# Altium PCB PCBgateway.PcbDoc
Units mm, origin at the board's own origin, x right, y up, seen from the top; angles counter-clockwise.
Board outline 58.8 x 67.31 mm, 2 copper layers (Top Layer, Bottom Layer); 35 components, 55 nets, 202 pads, 51 vias.
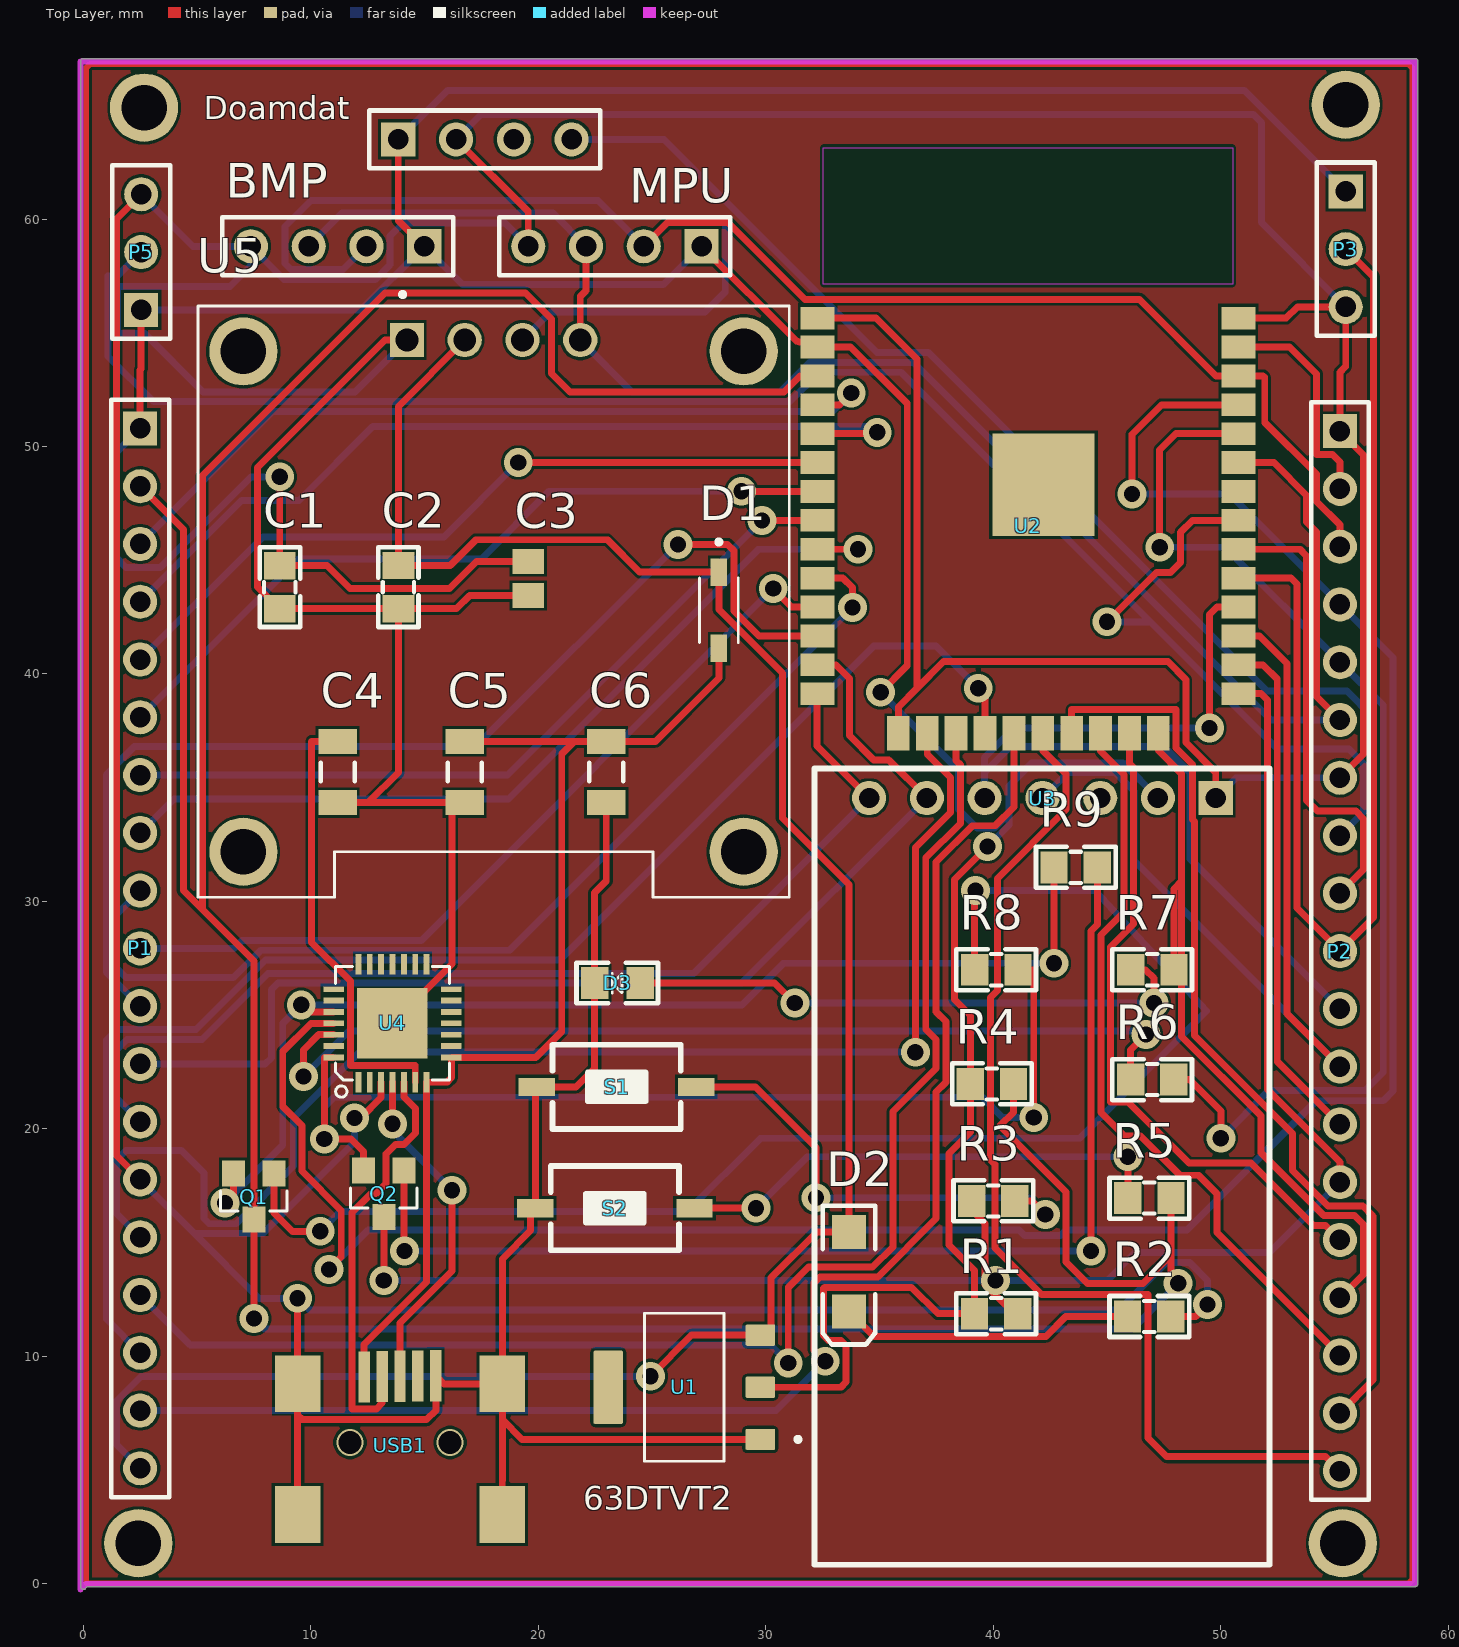
[diagram p0: Top Layer view]
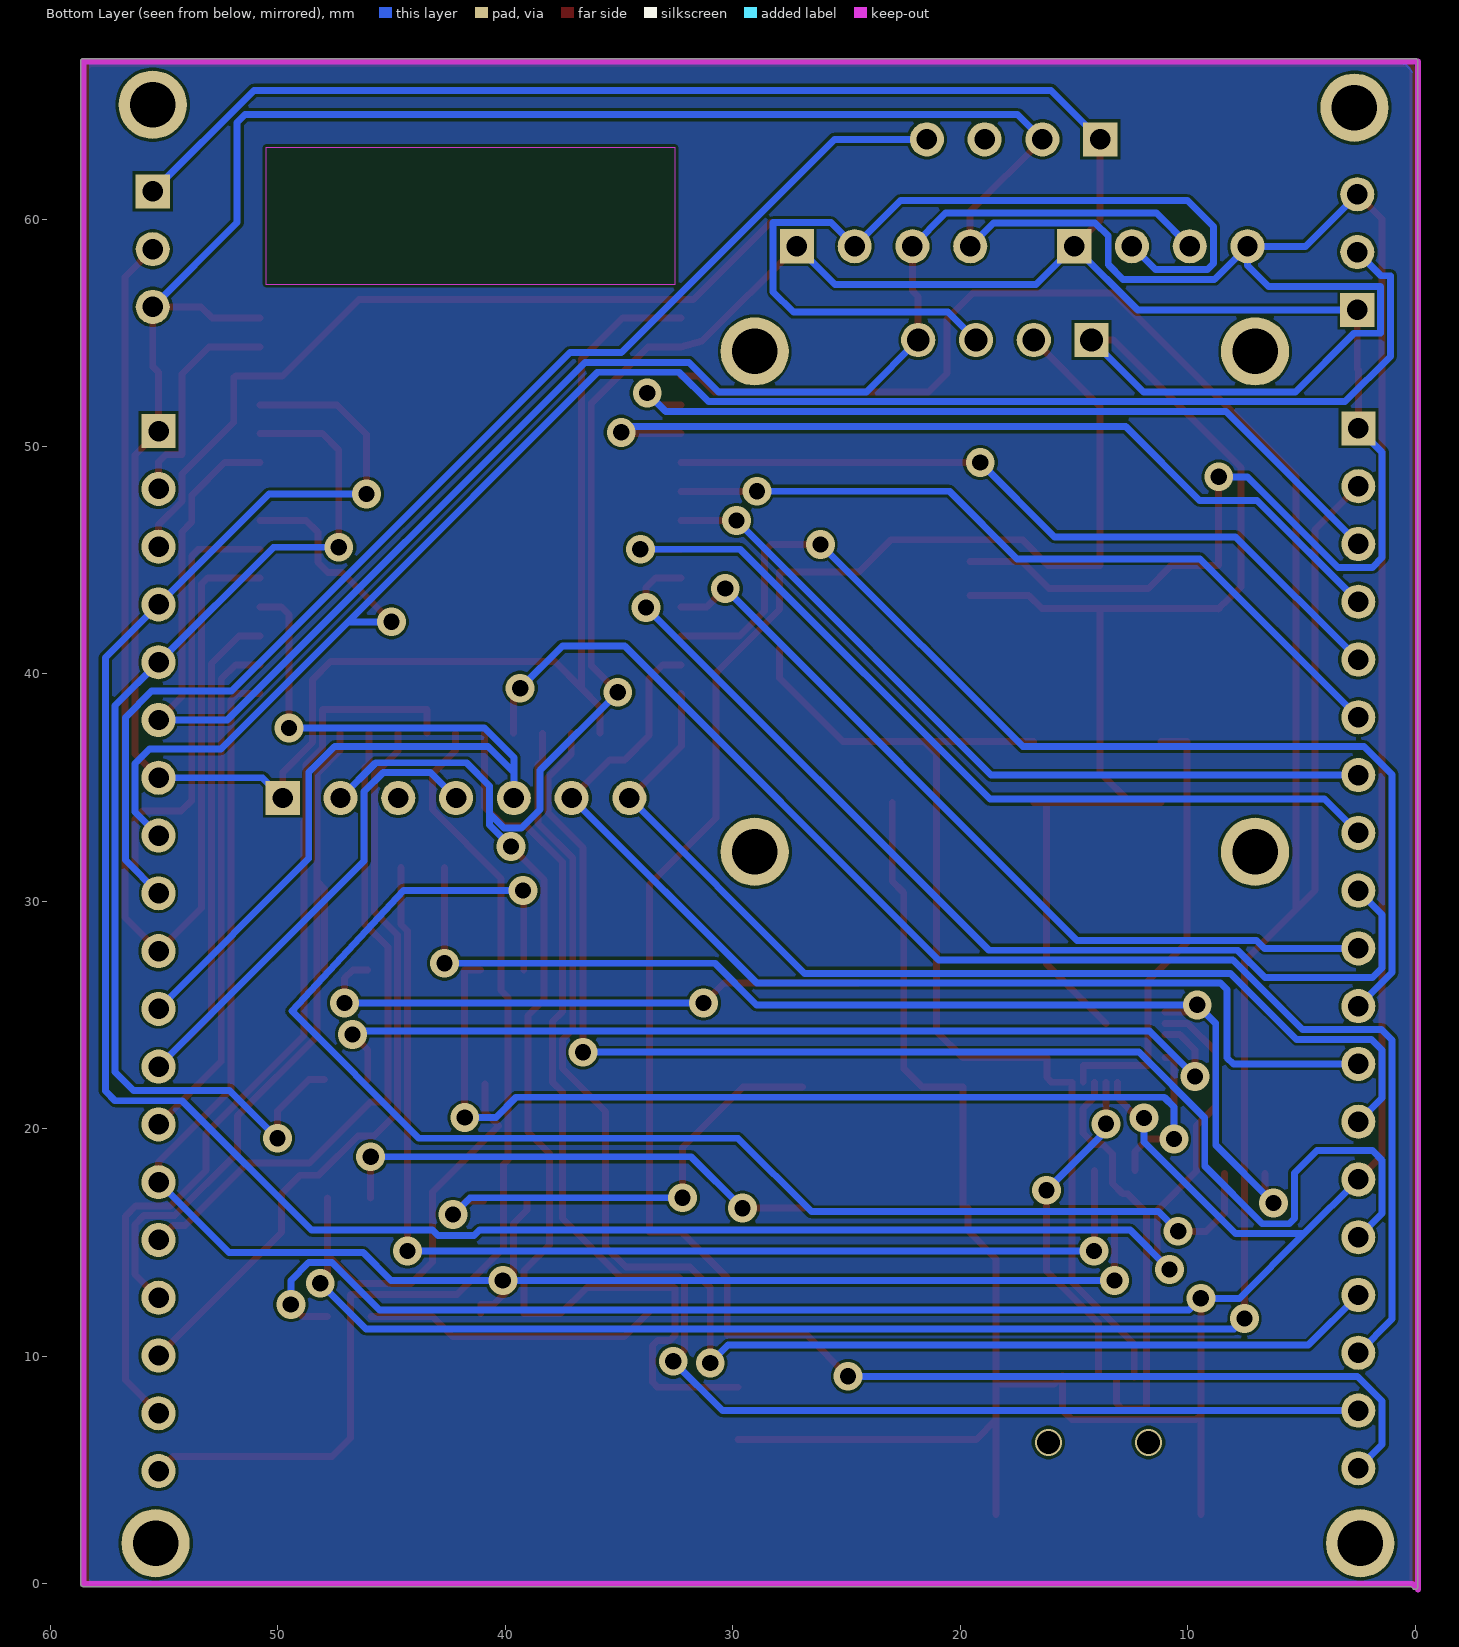
[diagram p1: Bottom Layer view, seen from below]
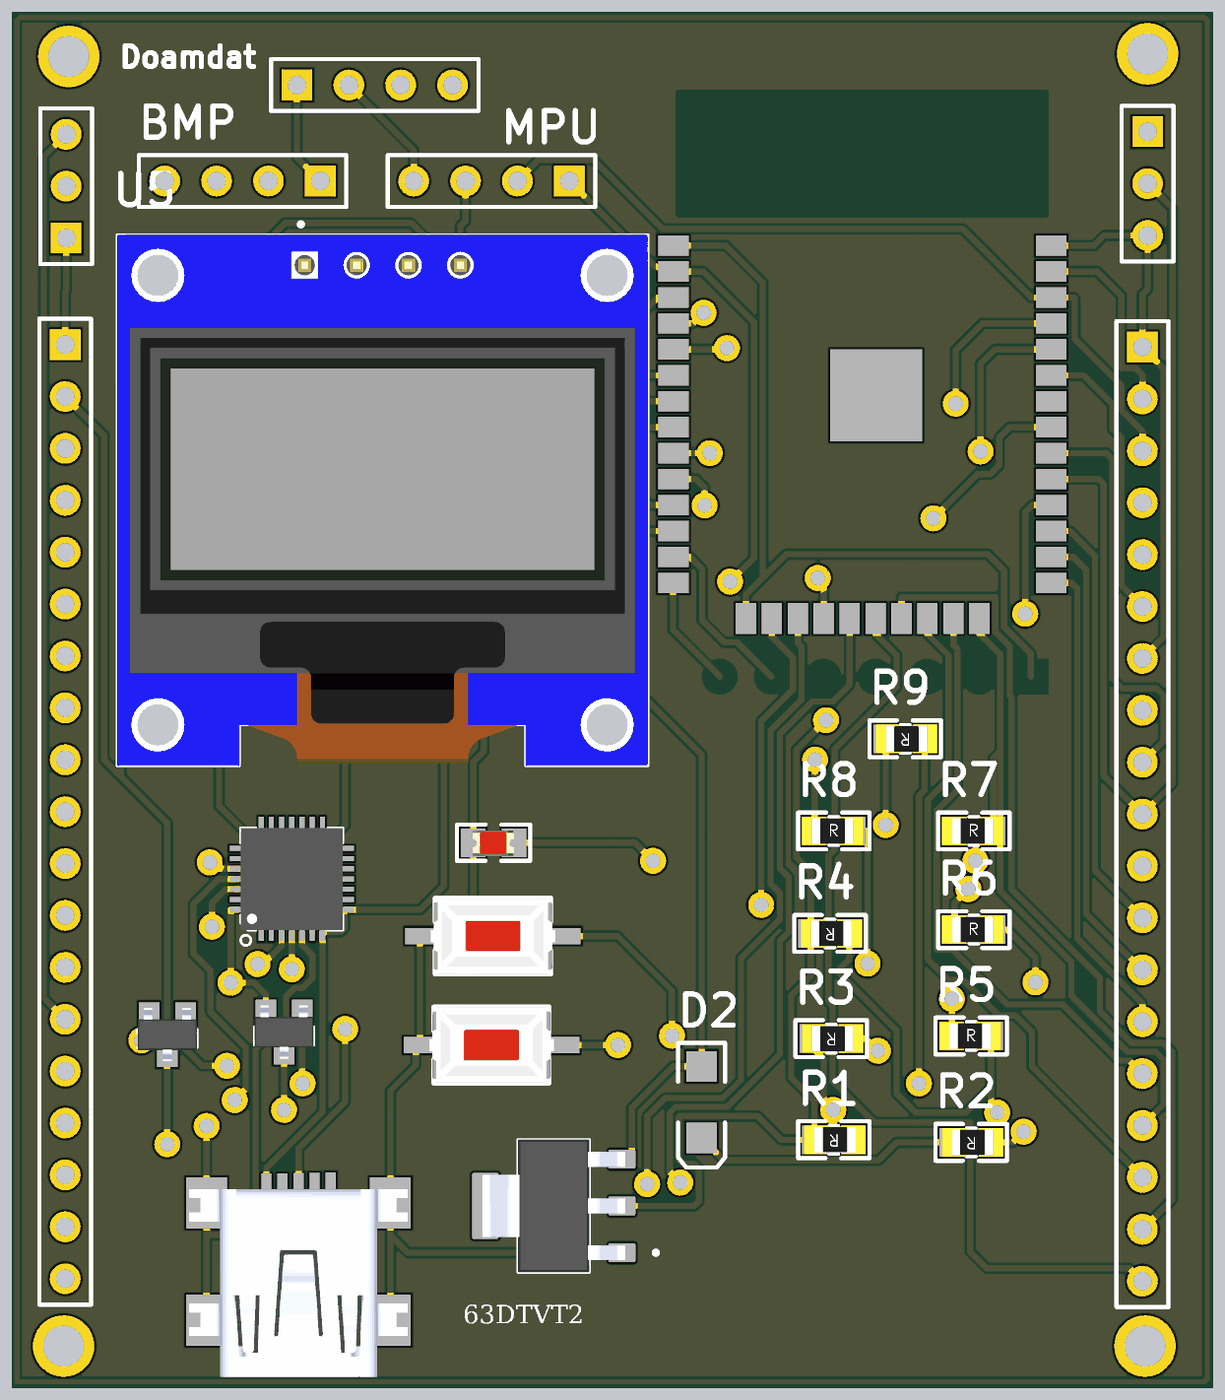
[diagram p2: 3D render of the assembled board from above, using the file's embedded part models]

## Layer stack, top to bottom
Top Solder: solder mask 0.0102, Solder Resist, Dk 3.5
Top Layer: signal copper 0.0356
Dielectric 1: dielectric 0.32, FR-4, Dk 4.8
Bottom Layer: signal copper 0.0356
Bottom Solder: solder mask 0.0102, Solder Resist, Dk 3.5

## Board outline
-0.127,-0.127 -0.127,66.929 cw(c0,66.929) 0,67.056 58.547,67.056 cw(c58.547,66.929) 58.674,66.929 58.674,0 cw(c58.547,0) 58.547,-0.127 0.18,-0.127 0.09,-0.217 cw(c0,-0.127)

## Design rules (kind name [scope] priority, off if disabled: settings)
Clearance [All] p1: gap=0.127 ignorepadtopadclearanceinfootprint=FALSE
PolygonConnect [All] p1: connectstyle=Relief reliefconductorwidth=0.254 reliefentries=4 polygonreliefangle="90 Angle" airgapwidth=0.254
RoutingVias [All] p1: holewidth=0.711 width=1.27 viastyle="Through Hole" minholewidth=0.711 minwidth=1.27 maxholewidth=0.711 maxwidth=1.27
SolderMaskExpansion [All] p1: expansion=0.102 istentingtop=FALSE
Width [All] p1: maxlimit=0.381 minlimit=0.254 preferedwidth=0.305
30 further rules are at their usual default settings.

## Components (designator, comment, footprint, x,y, rotation, side; value= is the part's Value field where it differs from the comment)
BMP "BME" HDR1X4 14.986,58.801 r180 top (schematic designator P7)
C1 "Cap" "Tu 0805" 8.636,43.815 r270 top value=10uF
C2 "Cap" "Tu 0805" 13.843,43.815 r90 top value=10uF
C3 "Cap Pol3" C0805 19.558,44.196 r270 top value=100uF
C4 "Cap Semi" C1206 11.176,35.687 r90 top value=1uF
C5 "Cap Semi" C1206 16.764,35.687 r90 top value=10uF
C6 "Cap Semi" C1206 22.987,35.687 r90 top value=100nF
D1 "1N5819HW-7-F" SOD3715X145N 27.94,42.799 r270 top
D2 "LED2" 3.2X1.6X1.1 33.655,13.716 r270 top
D3 "LED3" "led 0805" 23.483,26.365 r180 top
Doamdat "Do am dat" HDR1X4 13.843,63.5 r0 top (schematic designator P4)
MPU "MPU6050" HDR1X4 27.178,58.801 r180 top (schematic designator P6)
P1 "Header 19" HDR1X19 2.494,50.793 r270 top
P2 "Header 19" HDR1X19 55.245,50.673 r270 top
P3 "DHT11" HDR1X3 55.499,61.214 r270 top
P5 "CB lưu lượng nước" HDR1X3 2.54,56.007 r90 top
Q1 "SMD-TRANSISTORS-NPN-25V-500MW(SOT-23)" SOT-23 7.493,17.018 r180 top
Q2 "SMD-TRANSISTORS-NPN-25V-500MW(SOT-23)" SOT-23 13.208,17.145 r180 top
R1 "Res1" "Tro SMD 0805" 40.132,11.811 r180 top value=12K
R2 "Res1" "Tro SMD 0805" 46.863,11.684 r180 top value=1K
R3 "Res1" "Tro SMD 0805" 40.005,16.764 r180 top value=470
R4 "Res1" "Tro SMD 0805" 39.948,21.91 r180 top value=12K
R5 "Res1" "Tro SMD 0805" 46.863,17.018 r0 top value=470
R6 "Res1" "Tro SMD 0805" 46.99,22.225 r0 top value=470
R7 "Res1" "Tro SMD 0805" 46.99,27.051 r0 top value=470
R8 "Res1" "Tro SMD 0805" 40.132,27.051 r0 top value=12k
R9 "Res1" "Tro SMD 0805" 43.631,31.435 r180 top value=12k
S1 "SW-PB" SW-SMD 23.439,21.844 r180 top
S2 "SW-PB" SW-SMD 23.368,16.51 r180 top
U1 "AMS1117-3.3" SOT229P700X180-4N 26.416,8.636 r180 top
U2 "ESP-32S" ESP-32S 41.529,48.641 r0 top
U3 "E32-433T20D" LORA-E32 66.675,28.956 r90 top
U4 "INTERFACE-CP2102-GMR(QFN28)" QFN28G_0.5-5X5MM 13.589,24.638 r90 top
U5 "DM-OLED096-636" MODULE_DM-OLED096-636 18.034,43.18 r0 top
USB1 "MiniUSB 5P SMD" USB-B-Mini 13.919,8.788 r180 top

## Footprints (in the part's own frame and the unit in brackets; to place one, negate y for a bottom-side part, rotate by r counter-clockwise, add the part's x,y. Pads: shape width x height; smd on the part's side, far side on the other; paste and mask are expansions set on the pad)
3.2X1.6X1.1 [mm] "SMT LED; 2 Flat Leads"
  rect 1.5x1.5 smd: 1(-1.75,0) 2(1.75,0)
  silkscreen extent -2.9,-1.15 3.2,1.15
C0805 [mm] "Chip Capacitor, Body 2.0x1.3mm, IPC High Density"
  rect 1.1x1.4 smd: 1(-0.75,0) 2(0.75,0)
  body extent -1.1,-0.73 1.1,0.72, height 1.4
C1206 [mm] "Chip Capacitor, Body 3.2x1.6mm, IPC High Density"
  rect 1.1x1.7 smd: 1(-1.35,0) 2(1.35,0)
  silkscreen extent -0.4,-0.75 0.4,0.75, body extent -1.7,-0.9 1.7,0.9, height 1.3
ESP-32S [mm]
  rect 1.5x1 smd: 1(-9.25,7) 2(-9.25,5.73) 3(-9.25,4.46) 4(-9.25,3.19) 5(-9.25,1.92) 6(-9.25,0.65) 7(-9.25,-0.62) 8(-9.25,-1.89) 9(-9.25,-3.16) 10(-9.25,-4.43) 11(-9.25,-5.7) 12(-9.25,-6.97) 13(-9.25,-8.24) 14(-9.25,-9.51) 25(9.25,-9.51) 26(9.25,-8.24) 27(9.25,-6.97) 28(9.25,-5.7) 29(9.25,-4.43) 30(9.25,-3.16) 31(9.25,-1.89) 32(9.25,-0.62) 33(9.25,0.65) 34(9.25,1.92) 35(9.25,3.19) 36(9.25,4.46) 37(9.25,5.73) 38(9.25,7)
  rect 1x1.5 smd: 15(-5.7,-11.25) 16(-4.43,-11.25) 17(-3.16,-11.25) 18(-1.89,-11.25) 19(-0.62,-11.25) 20(0.65,-11.25) 21(1.92,-11.25) 22(3.19,-11.25) 23(4.46,-11.25) 24(5.73,-11.25)
  rect 4.5x4.5 smd: GND(0.68,-0.33)
  Keep-Out Layer region: 9,8.5 -9,8.5 -9,14.5 9,14.5
  Keep-Out Layer region: 9,8.5 -9,8.5 -9,14.5 9,14.5
HDR1X3 [mm] "Connector; Header; 3 Position"
  rect 1.5x1.5 hole 0.9: 1(0,0)
  round 1.5 hole 0.9: 2(2.54,0) 3(5.08,0)
  silkscreen extent -1.27,-1.27 6.35,1.27
HDR1X4 [mm] "Connector; Header; 4 Position"
  rect 1.5x1.5 hole 0.9: 1(0,0)
  round 1.5 hole 0.9: 2(2.54,0) 3(5.08,0) 4(7.62,0)
  silkscreen extent -1.27,-1.27 8.89,1.27
HDR1X19 [mm] "Connector; Header; 19 Position"
  rect 1.5x1.5 hole 0.9: 1(0,0)
  round 1.5 hole 0.9: 2(2.54,0) 3(5.08,0) 4(7.62,0) 5(10.16,0) 6(12.7,0) 7(15.24,0) 8(17.78,0) 9(20.32,0) 10(22.86,0) 11(25.4,0) 12(27.94,0) 13(30.48,0) 14(33.02,0) 15(35.56,0) 16(38.1,0) 17(40.64,0) 18(43.18,0) 19(45.72,0)
  silkscreen extent -1.27,-1.27 46.99,1.27
"led 0805" [mm]
  rect 1.2x1.4 smd: 1(-0.996,-0.051) 2(1.004,-0.051)
  silkscreen extent -1.78,-0.94 1.8,0.84, body extent -0.98,-0.65 1.04,0.6, height 1.1
LORA-E32 [mm] "Design By @Alixahedi"
  rect 1.5x1.5 hole 0.9: 1(5.588,16.891)
  round 1.5 hole 0.9: 2(5.588,19.431) 3(5.588,21.971) 4(5.588,24.511) 5(5.588,27.051) 6(5.588,29.591) 7(5.588,32.131)
  silkscreen extent -28.12,14.53 6.88,34.53, body extent -41.39,14.01 7.11,35.01, height 8.1
MODULE_DM-OLED096-636 [mm]
  rect 1.508x1.508 / inner round 1.508 / far side rect 1.508x1.508 hole 1: 1(-3.81,11.5)
  round 1.508 hole 1: 2(-1.27,11.5) 3(1.27,11.5) 4(3.81,11.5)
  round 3 hole 2: S1(-11,11) S2(11,11) S3(11,-11) S4(-11,-11)
  silkscreen extent -13,-13 13,13.6, body extent -13,-13 13,13, height 5.66
QFN28G_0.5-5X5MM [mm]
  rect 0.9x0.254 smd: 1(-2.59,1.5) 2(-2.59,1) 3(-2.59,0.5) 4(-2.59,0) 5(-2.59,-0.5) 6(-2.59,-1) 7(-2.59,-1.5) 15(2.59,-1.5) 16(2.59,-1) 17(2.59,-0.5) 18(2.59,0) 19(2.59,0.5) 20(2.59,1) 21(2.59,1.5)
  rect 0.254x0.9 smd: 8(-1.5,-2.59) 9(-1,-2.59) 10(-0.5,-2.59) 11(0,-2.59) 12(0.5,-2.59) 13(1,-2.59) 14(1.5,-2.59) 22(1.5,2.59) 23(1,2.59) 24(0.5,2.59) 25(0,2.59) 26(-0.5,2.59) 27(-1,2.59) 28(-1.5,2.59)
  rect 3.1x3.1 smd paste-3: 29(0,0)
  silkscreen extent -3.25,-2.5 2.5,2.5, body extent -2.5,-2.5 2.5,2.5, height 1
SOD3715X145N [mm]
  rect 1.21x0.73 smd: A(1.68,0) C(-1.68,0)
  silkscreen extent -3.1,-0.85 1.42,0.85, body extent -1.83,-0.77 1.83,0.77, height 0.8
SOT229P700X180-4N [mm]
  rrect15% 1.31x0.93 smd: 1(-3.345,2.29) 2(-3.345,0) 3(-3.345,-2.29)
  rrect15% 1.31x3.24 smd: 4(3.345,0)
  silkscreen extent -5.1,-3.25 1.75,3.25, body extent -3.5,-3.25 3.5,3.25, height 1.8
SOT-23 [mil]
  rect 40x45 smd: 1(-35,-40) 2(35,-40) 3(0,40)
  silkscreen extent -58,-10 58,25, body extent -57,-51 57,51, height 55
SW-SMD [mm] "Switch SMD type"
  rect 1.6x0.8 smd: 1(-3.5,0) 2(3.5,0)
  silkscreen extent -2.82,-1.85 2.82,1.85, body extent -3.05,-1.85 3.05,1.85, height 2.5
"Tro SMD 0805" [mm]
  rect 1.2x1.4 smd: 1(-0.946,-0.061) 2(0.954,-0.061)
  silkscreen extent -1.75,-0.97 1.75,0.84, body extent -1.56,-0.76 1.44,0.64, height 0.53
"Tu 0805" [mm] "Compoment SMD 80x50mil"
  rect 1.2x1.4 smd: 1(-0.946,-0.003) 2(0.954,-0.003)
  silkscreen extent -1.75,-0.89 1.75,0.89, body extent -1.01,-0.64 1.01,0.63, height 0.61
USB-B-Mini [mm]
  rect 0.5x2.25 smd: 1(1.575,-0.305) 2(0.787,-0.317) 3(0,-0.33) 4(-0.787,-0.343) 5(-1.575,-0.356)
  rect 2x2.5 smd: 5(-4.5,0) 5(-4.496,5.74) 5(4.5,0) 5(4.504,5.74)
  body extent -5.35,-0.67 5.35,8.53, height 3.95

## Part data
BMP Doamdat MPU: library part "Header 4", "Header, 4-Pin", LatestRevisionDate=17-Jul-2002, LatestRevisionNote="Re-released for DXP Platform.", Publisher="Altium Limited"
C1 C2: "Capacitor", LatestRevisionDate=17-Jul-2002, LatestRevisionNote="Re-released for DXP Platform.", PackageDescription="Radial Cap, Thru-Hole; 2 Leads; 0.3 in Pin Spacing", PackageReference=RAD-0.3, Published=8-Jun-2000, Publisher="Altium Limited"
C3: "Polarized Capacitor (Surface Mount)", LatestRevisionDate=29-May-2009, LatestRevisionNote="IPC-7351 Footprint Added.", PackageDescription="Chip Capacitor", PackageReference=C0805, Published=8-Jun-2000, Publisher="Altium Limited"
C4 C5 C6: "Capacitor (Semiconductor SIM Model)", LatestRevisionDate=29-May-2009, LatestRevisionNote="IPC-7351 Footprint Added.", PackageDescription="Chip Capacitor", PackageReference=C1206, Published=8-Jun-2000, Publisher="Altium Limited"
D1: "Diode Schottky 40 V 1A Surface Mount SOD-123", Package="SOD-123 Fairchild Semiconductor", Availability="In Stock", Check_prices=https://www.snapeda.com/parts/1N5819HW-7-F/Diodes+Inc./view-part/?ref=eda, MF="Diodes Inc.", MP=1N5819HW-7-F, Price=None, Purchase-URL=https://pricing.snapeda.com/search/part/1N5819HW-7-F/?ref=eda, SnapEDA_Link=https://www.snapeda.com/parts/1N5819HW-7-F/Diodes+Inc./view-part/?ref=snap
D2: "Typical RED, GREEN, YELLOW, AMBER GaAs LED", LatestRevisionDate=17-Jul-2002, LatestRevisionNote="Re-released for DXP Platform.", PackageDescription="SM LED; 2 Flat Leads", PackageReference=3.2X1.6X1.1, PackageVersion=Feb-2002, Published=8-Jun-2000, Publisher="Altium Limited"
D3: "Typical BLUE SiC LED", DatasheetVersion=16-Apr-2002, LatestRevisionDate=17-Dec-2003, LatestRevisionNote="PCB Footprint replaced.", PackageDescription="SM LED; 2 C-Bend Leads; Body 3.5 x 2.8 x 1.9 mm, inc leads (LxWxH typ)", PackageReference=3.5X2.8X1.9, PackageVersion=16-Apr-2002, Published=8-Jun-2000, Publisher="Altium Limited"
P1 P2: "Header, 19-Pin", LatestRevisionDate=17-Jul-2002, LatestRevisionNote="Re-released for DXP Platform.", Publisher="Altium Limited"
P3 P5: library part "Header 3", "Header, 3-Pin", LatestRevisionDate=17-Jul-2002, LatestRevisionNote="Re-released for DXP Platform.", Publisher="Altium Limited"
Q1 Q2: "Bipolar (BJT) Transistor NPN 25 V 500 mA 150MHz 300 mW Surface Mount SOT-23", Package=None, Availability="In Stock", Check_prices=https://www.snapeda.com/parts/S8050/Umwelt+Sensor+Teknik/view-part/?ref=eda, MF=UMW, MP=S8050, Price=None, Purchase-URL=https://pricing.snapeda.com/search/part/S8050/?ref=eda, SnapEDA_Link=https://www.snapeda.com/parts/S8050/Umwelt+Sensor+Teknik/view-part/?ref=snap
R1 R2 R3 R4 R5 R6 R7 R8 R9: "Resistor", LatestRevisionDate=17-Jul-2002, LatestRevisionNote="Re-released for DXP Platform.", PackageDescription="Axial Device, Thru-Hole; 2 Leads; 0.3 in Pin Spacing", PackageReference=AXIAL-0.3, Published=8-Jun-2000, Publisher="Altium Limited"
S1 S2: "Switch", LatestRevisionDate=17-Jul-2002, LatestRevisionNote="Re-released for DXP Platform.", PackageDescription="Switch; 2 Leads", PackageReference=SPST-2, Published=24-Mar-1999, Publisher="Altium Limited"
U1: "Sot223/Pkg 1-Amp 3.3-Volt Low Drop Out Voltage Regulatator", Package="SOT-223 Seeed Technology", Availability="Not in stock", Check_prices=https://www.snapeda.com/parts/AMS1117-3.3/Advanced+Monolithic+Systems/view-part/?ref=eda, MF="Advanced Monolithic Systems", MP=AMS1117-3.3, Price=None, SnapEDA_Link=https://www.snapeda.com/parts/AMS1117-3.3/Advanced+Monolithic+Systems/view-part/?ref=snap
U2: "- - Transceiver Module - - Surface Mount", Package=None, Check_prices=https://www.snapeda.com/parts/ESP-32S/Olimex+LTD/view-part/?ref=eda, MF="Olimex LTD", MP=ESP-32S, SnapEDA_Link=https://www.snapeda.com/parts/ESP-32S/Olimex+LTD/view-part/?ref=snap
U3: library part LORA-E32, "Design By @Alixahedi"
U4: "USB Bridge, USB to UART USB 2.0 UART Interface 28-QFN (5x5)", Package="VFQFN-28 Vishay Siliconix", Availability="In Stock", Check_prices=https://www.snapeda.com/parts/CP2102-GMR/Silicon+Labs/view-part/?ref=eda, MF=Silicon, MP=CP2102-GMR, Price=None, Purchase-URL=https://pricing.snapeda.com/search/part/CP2102-GMR/?ref=eda, SnapEDA_Link=https://www.snapeda.com/parts/CP2102-GMR/Silicon+Labs/view-part/?ref=snap
U5: "0.96â€ 128 X 64 MONOCHROME GRAPHIC OLED DISPLAY MODULE - I2C", Package=Package, Check_prices=https://www.snapeda.com/parts/DM-OLED096-636/Display+Module/view-part/?ref=eda, MF="Display Module", MP=DM-OLED096-636, SnapEDA_Link=https://www.snapeda.com/parts/DM-OLED096-636/Display+Module/view-part/?ref=snap
USB1: library part USB_MINI, "Dán", Chung_Loai=Dán, Don_Vi=Con, Ma_Hang=MH001022, Ten_Linh_Kien="MiniUSB 5P SMD"

## Free pads (board coordinates)
  round 3 hole 2: 3(2.413,1.778) 3(2.667,64.897) 3(55.372,1.778) 3(55.499,65.024)

## Via types
v1: diameter 1.27, hole 0.711, Top Layer to Bottom Layer, 49 vias
v2: diameter 1.2, hole 1, Top Layer to Bottom Layer, 2 vias

## Nets (pads, with @x,y where several pads share a name; then routed paths per layer and width w, separated by ;. In a path a pad name is that pad's centre, name@x,y a point inside that pad or via, vN(x,y) a via of type N, cw(c..) or ccw(c..) an arc to the next point about the centre after c; other vN are vias at no path point)
#EN: P1.2 Q1.3 R4.1 R5.2 U2.3 | length 151.9
  Top Layer w0.305: P1.2 4.394,46.352 4.394,30.48 5.232,29.642 ; v1(7.493,11.659) Q1.3 7.493,27.381 5.232,29.642 ; U2.3 31.511,53.101 30.81,52.4 21.387,52.4 20.574,53.213 20.574,55.601 19.431,56.744 13.259,56.744 5.232,48.717 5.232,29.642 ; R4.1 40.894,20.726 40.305,20.138 40.305,20.123 43.207,17.222 43.207,14.147 44.145,13.208 46.584,13.208 47.817,14.442 ; R5.2 47.817,14.442 ; v1(48.133,13.208) 47.817,13.524 47.817,14.442
  Bottom Layer w0.305: v1(7.493,11.659) 7.95,11.201 46.126,11.201 v1(48.133,13.208)
ACTIVE: U4.11
CLK: P2.19 U2.20 | length 47.5
  Top Layer w0.305: U2.20 42.179,36.637 43.205,35.611 43.205,34.036 40.183,31.013 40.183,26.086 39.873,25.776 39.873,18.638 40.071,18.44 40.071,14.767 42.114,12.724 46.812,12.724 46.812,6.401 47.625,5.588 54.61,5.588 P2.19
CMD: P1.18 U2.19 | length 64.9
  Top Layer w0.305: v1(32.614,9.779) 32.11,10.282 32.11,13.213 32.385,13.487 34.925,13.487 37.49,16.053 37.49,21.615 37.922,22.047 37.922,24.714 37.49,25.146 37.49,31.73 39.085,33.325 40.081,33.325 40.909,34.153 U2.19
  Bottom Layer w0.305: P1.18 30.447,7.613 v1(32.614,9.779)
CTS: U4.23
D_N: U4.5 USB1.2 | length 18.7
  Top Layer w0.305: USB1.2 13.132,7.943 12.878,7.689 11.815,7.689 11.815,16.311 12.649,17.145 12.852,17.145 13.31,17.602 13.31,18.902 13.712,19.304 14.097,19.304 14.605,19.812 14.605,20.888 14.089,21.404 U4.5
D_P: U4.4 USB1.3 | length 15
  Top Layer w0.305: v1(13.589,20.218) U4.4 ; USB1.3 13.919,11.455 16.205,13.741 v1(16.205,17.297)
  Bottom Layer w0.305: v1(13.589,20.218) 13.589,19.914 v1(16.205,17.297)
DCD: U4.1
DSR: U4.27
DTR: Q2.2 R8.2 U4.28 | length 47.1
  Top Layer w0.305: U4.28 10.592,23.138 v1(10.592,19.558) 11.76,19.558 12.319,18.999 Q2.2 ; R8.2 41.783,26.99 v1(41.783,20.498)
  Bottom Layer w0.305: v1(10.592,19.558) 10.592,20.953 11.026,21.387 39.522,21.387 40.411,20.498 v1(41.783,20.498)
GND: BMP.4 C1.2 C2.1 C3.2 C4.1 C5.1 C6.1 D3.2 Doamdat.2 MPU.4 P1.14 P2.1 P2.7 P3.3 P5.3 R2.1 S1.2 S2.2 U1.1 U2.1 U2.15 U2.38 U3.1 U4.3 U4.29 U5.1 USB1.5 | length 397.3
  Top Layer w0.305: P1.14 1.448,18.819 1.448,59.995 P5.3 ; C1.2@8.591,42.869 C1.2@8.633,42.869 ; C1.2 C1.2@8.633,42.869 ; USB1.5@9.415,3.048 9.415,5.893 9.419,5.897 9.419,7.417 ; v1(9.419,12.548) 9.419,8.788 9.419,7.417 ; C4.1 12.522,34.337 ; v1(11.913,20.472) 12.194,20.472 13.089,21.367 U4.3 ; U4.29 16.205,27.254 C5.1@16.205,34.337 ; U5.1 13.253,54.68 7.645,49.073 7.645,43.815 C1.2@8.633,42.869 ; Doamdat.2 19.558,60.325 MPU.4 ; C5.1 C5.1@16.205,34.337 ; USB1.5@18.415,3.048 18.419,5.922 18.419,7.214 ; C3.2 16.985,43.446 16.408,42.869 C2.1 ; C6.1 22.987,30.886 22.479,30.378 D3.2 22.479,22.657 21.666,21.844 S1.2 19.868,21.844 S2.2 19.66,16.51 19.66,15.519 18.419,14.279 USB1.5@18.419,8.788 ; U1.1 19.287,6.346 18.419,7.214 ; U2.1 34.849,55.641 36.652,53.838 36.652,39.37 ; U2.15 35.829,38.547 36.652,39.37 ; R2.1 48.905,11.745 v1(49.428,12.268) ; U3.1 49.784,35.662 48.47,36.975 48.47,39.744 47.676,40.538 37.821,40.538 36.652,39.37 ; U2.38 52.883,55.641 53.376,56.134 P3.3 55.499,53.518 55.245,53.264 P2.1 56.286,49.632 56.286,36.474 P2.7 ; C1.2@8.633,42.869 C2.1 ; 9.419,7.417 9.622,7.214 15.088,7.214 15.494,7.62 15.494,9.144 15.85,8.788 USB1.5@18.419,8.788 ; 12.522,34.337 C5.1@16.205,34.337 ; 12.522,34.337 13.846,35.662 C2.1 ; 18.419,7.214 USB1.5@18.419,8.788
  Bottom Layer w0.305: P1.14 4.874,15.392 ; P5.3 4.826,58.801 BMP.4 ; v1(11.913,20.472) 11.913,19.411 7.894,15.392 4.874,15.392 ; U5.1 11.945,52.401 5.258,52.401 2.681,54.978 1.511,54.978 1.511,57.036 6.44,57.036 7.366,57.963 BMP.4 ; Doamdat.2 17.475,64.592 51.435,64.592 51.791,64.237 51.791,59.842 P3.3 ; MPU.4 18.529,59.83 14.072,59.83 13.487,59.246 13.487,57.988 12.839,57.34 8.827,57.34 BMP.4 ; v1(49.428,12.268) 49.428,13.335 48.641,14.122 47.625,14.122 45.537,12.034 9.933,12.034 v1(9.419,12.548) 7.719,12.548 4.874,15.392 ; U3.1 50.673,35.433 P2.7
IO0: P2.14 Q2.3 R1.1 R3.2 U2.25 | length 77.3
  Top Layer w0.305: v1(13.208,13.335) Q2.3 ; R3.2 39.051,16.428 39.639,15.839 39.639,13.802 ; v1(40.107,13.335) 39.639,13.802 ; R1.1 41.078,12.268 40.513,12.268 39.776,13.005 39.639,13.142 39.639,13.335 39.639,13.802 ; U2.25 51.774,39.131 52.057,38.848 52.057,21.719 55.245,18.531 P2.14
  Bottom Layer w0.305: v1(13.208,13.335) v1(40.107,13.335) 45.025,13.335 46.244,14.554 52.146,14.554 P2.14
IO2: P2.16 R7.2 U2.24 | length 33.8
  Top Layer w0.305: U2.24 47.259,36.637 48.285,35.611 48.285,30.886 ; R7.2 47.944,30.545 48.285,30.886 ; P2.16 56.274,13.602 56.274,15.799 55.893,16.18 54.533,16.18 51.765,18.947 51.765,20.574 48.285,24.054 48.285,26.99 48.285,30.886
IO4: P2.13 U2.26 | length 22.7
  Top Layer w0.305: U2.26 51.867,40.401 52.488,39.779 52.488,22.95 P2.13
IO5: P2.10 P3.2 U2.29 | length 51.6
  Top Layer w0.305: U2.29 53.086,44.211 53.352,43.945 53.352,29.706 P2.10 56.718,29.286 56.718,57.455 P3.2
IO12: P1.13 U2.14 U3.7 | length 46.8
  Top Layer w0.305: U2.14 32.258,39.131 32.258,36.83 U3.7
  Bottom Layer w0.305: P1.13 1.448,21.359 1.448,23.47 1.91,23.931 5.205,23.931 8.109,26.835 26.835,26.835 U3.7
IO13: P1.15 U2.16 | length 61.1
  Top Layer w0.305: v1(36.576,23.368) 36.576,32.36 38.125,33.909 38.125,35.448 37.099,36.474 U2.16
  Bottom Layer w0.305: P1.15 1.448,16.279 1.448,18.618 1.88,19.05 4.318,19.05 5.309,18.059 5.309,16.053 5.537,15.824 6.706,15.824 9.246,18.364 9.246,20.472 12.141,23.368 v1(36.576,23.368)
IO14: P1.12 U2.13 U3.6 | length 49.9
  Top Layer w0.305: U2.13 33.081,40.401 33.68,39.802 33.68,37.287 34.747,36.22 35.408,36.22 U3.6
  Bottom Layer w0.305: P1.12 7.991,22.853 8.261,23.123 8.261,26.117 8.547,26.403 28.943,26.403 U3.6
IO15: P2.15 U2.23 | length 29.3
  Top Layer w0.305: U2.23 45.989,36.068 46.177,35.88 46.177,29.003 45.165,27.991 45.165,21.184 45.926,21.184 48.612,18.497 51.329,18.497 54.078,15.748 54.61,15.748 P2.15
IO16: P2.12 U2.27 U3.4 | length 42
  Top Layer w0.305: U2.27 51.699,41.671 52.92,40.45 52.92,25.058 P2.12
  Bottom Layer w0.305: U3.4 43.282,35.662 45.364,35.662 46.203,34.823 46.203,31.775 P2.12
IO17: P2.11 U2.28 U3.5 | length 41.7
  Top Layer w0.305: v1(49.505,37.617) 49.505,42.611 49.835,42.941 U2.28
  Bottom Layer w0.305: U3.5 39.624,35.662 ; v1(49.505,37.617) 40.915,37.617 39.624,36.327 39.624,35.662 ; P2.11 48.641,31.877 48.641,35.662 47.498,36.805 40.767,36.805 39.624,35.662
IO18: Doamdat.4 P2.9 U2.30 | length 74.5
  Top Layer w0.305: U2.30 53.489,45.481 53.784,45.187 53.784,34.442 54.254,33.972 55.944,33.972 56.286,33.63 56.286,31.394 P2.9
  Bottom Layer w0.305: Doamdat.4 25.527,63.5 34.899,54.127 37.16,54.127 52.045,39.243 55.55,39.243 56.706,38.087 56.706,31.814 P2.9
IO19: P2.8 P5.2 U2.31 | length 83
  Top Layer w0.305: v1(45.009,42.291) 47.178,44.46 47.803,44.46 48.235,44.892 48.235,46.228 48.758,46.751 U2.31
  Bottom Layer w0.305: P5.2 1.499,57.506 1.079,57.506 1.079,53.963 3.073,51.969 31.06,51.969 32.355,53.264 35.941,53.264 46.914,42.291 ; v1(45.009,42.291) 46.914,42.291 ; P2.8 56.274,33.922 56.274,36.068 55.639,36.703 52.502,36.703 46.914,42.291
IO21: BMP.3 MPU.3 P2.6 U2.33 U5.4 | length 73.1
  Top Layer w0.305: U5.4 21.844,56.591 22.098,56.845 MPU.3 ; U2.33 52.346,49.291 53.784,47.854 53.784,46.672 54.216,46.24 54.216,39.002 P2.6
  Bottom Layer w0.305: BMP.3 11.367,60.262 20.637,60.262 MPU.3 ; U5.4 24.123,52.401 30.621,52.401 31.916,53.696 36.5,53.696 52.222,37.973 P2.6
IO22: BMP.2 MPU.2 P2.3 U2.36 U5.3 | length 79
  Top Layer w0.305: MPU.2 25.679,59.842 28.346,59.842 31.725,56.464 46.431,56.464 49.794,53.101 U2.36 51.867,53.101 51.939,53.029 51.939,51.057 54.216,48.78 54.216,47.588 55.245,46.558 P2.3
  Bottom Layer w0.305: BMP.2 11.417,57.772 9.132,57.772 8.865,58.039 8.865,59.665 10.008,60.808 22.631,60.808 MPU.2 25.679,59.842 28.219,59.842 28.219,56.794 27.33,55.905 20.529,55.905 U5.3
IO23: P2.2 U2.37 | length 9.8
  Top Layer w0.305: U2.37 53.032,54.371 54.216,53.188 54.216,49.644 54.915,49.644 55.245,49.313 P2.2
IO25: P1.9 U2.10 | length 45.7
  Top Layer w0.305: U2.10 33.386,44.211 33.807,43.79 v1(33.807,42.926)
  Bottom Layer w0.305: P1.9 1.448,29.426 1.448,27.076 1.88,26.645 6.603,26.645 7.81,27.851 18.732,27.851 v1(33.807,42.926)
IO26: P1.10 U2.11 | length 36.7
  Top Layer w0.305: v1(30.328,43.754) 31.14,42.941 U2.11
  Bottom Layer w0.305: P1.10 6.616,27.933 6.966,28.283 14.857,28.283 v1(30.328,43.754)
IO27: P1.11 U2.12 | length 49.5
  Top Layer w0.305: v1(26.137,45.695) 28.321,45.695 28.6,45.415 28.6,42.775 29.704,41.671 U2.12
  Bottom Layer w0.305: P1.11 1.016,26.87 1.016,35.585 2.235,36.805 17.247,36.805 v1(26.137,45.695)
IO32: P1.7 U2.8 | length 34.4
  Top Layer w0.305: v1(29.835,46.751) U2.8
  Bottom Layer w0.305: P1.7 18.636,35.553 v1(29.835,46.751)
IO33: P1.8 U2.9 | length 38.5
  Top Layer w0.305: U2.9 v1(34.061,45.481)
  Bottom Layer w0.305: P1.8 3.975,34.493 18.694,34.493 29.682,45.481 v1(34.061,45.481)
IO34: P1.5 U2.6 | length 33.4
  Top Layer w0.305: v1(19.116,49.291) U2.6
  Bottom Layer w0.305: P1.5 7.886,46.025 15.85,46.025 v1(19.116,49.291)
IO35: P1.6 U2.7 | length 33.9
  Top Layer w0.305: v1(28.931,48.031) 28.941,48.021 U2.7
  Bottom Layer w0.305: P1.6 9.461,45.06 17.501,45.06 20.472,48.031 v1(28.931,48.031)
NetC4_2: C4.2 U4.6 | length 19.7
  Top Layer w0.305: C4.2 10.033,37.037 10.033,28.194 11.735,26.492 11.735,22.784 14.589,22.784 U4.6
NetD2_2: D2.2 R2.2 | length 13.1
  Top Layer w0.305: D2.2 34.75,10.871 42.316,10.871 43.19,11.745 R2.2
NetD3_1: D3.1 R7.1 | length 25.2
  Top Layer w0.305: D3.1 30.389,26.416 v1(31.278,25.527) ; R7.1 46.695,26.99 47.065,26.62 v1(47.065,25.527)
  Bottom Layer w0.305: v1(31.278,25.527) v1(47.065,25.527)
NetQ1_1: Q1.1 R8.1 | length 63.1
  Top Layer w0.305: Q1.1 8.382,16.307 9.195,15.494 v1(10.414,15.494) ; R8.1 39.186,30.449 v1(39.218,30.48)
  Bottom Layer w0.305: v1(10.414,15.494) 11.278,16.358 26.543,16.358 29.769,19.583 43.79,19.583 49.378,25.171 44.475,30.48 v1(39.218,30.48)
NetQ2_1: Q2.1 R9.1 | length 50.7
  Top Layer w0.305: Q2.1 14.097,14.656 v1(14.122,14.63) ; v1(44.298,14.63) 44.298,28.702 44.577,28.981 R9.1
  Bottom Layer w0.305: v1(14.122,14.63) v1(44.298,14.63)
NetR3_1: R3.1 S1.1 | length 20.6
  Top Layer w0.305: S1.1 29.54,21.844 32.207,19.177 v1(32.207,16.967) ; R3.1 41.697,16.825 v1(42.291,16.231)
  Bottom Layer w0.305: v1(32.207,16.967) 41.554,16.967 v1(42.291,16.231)
NetR5_1: R5.1 S2.1 | length 21.8
  Top Layer w0.305: S2.1 v1(29.566,16.51) ; R5.1 v1(45.917,18.771)
  Bottom Layer w0.305: v1(29.566,16.51) 31.826,18.771 v1(45.917,18.771)
NetR6_1: R6.1 U4.26 | length 43
  Top Layer w0.305: v1(9.677,22.301) 9.677,23.47 10.346,24.138 U4.26 ; R6.1 46.044,23.47 v1(46.72,24.146)
  Bottom Layer w0.305: v1(9.677,22.301) 11.674,24.298 46.568,24.298 v1(46.72,24.146)
OTG_ID: USB1.4
RI: U4.2
RTS: Q1.2 R9.2 U4.24 | length 51.2
  Top Layer w0.305: v1(6.223,16.739) 6.604,17.12 Q1.2 ; v1(9.576,25.451) 9.889,25.138 U4.24 ; v1(42.677,27.28) R9.2
  Bottom Layer w0.305: v1(6.223,16.739) 8.763,19.279 8.763,24.638 v1(9.576,25.451) 28.956,25.451 30.785,27.28 v1(42.677,27.28)
SD0: P2.18 U2.21 | length 41.7
  Top Layer w0.305: U2.21 43.449,38.43 48.038,38.43 48.038,36.737 48.755,36.021 48.755,33.592 48.844,33.503 48.844,24.108 53.164,19.788 53.164,18.159 54.712,16.612 56.249,16.612 56.706,16.154 56.706,8.954 P2.18
SD1: P2.17 U2.22 | length 33.4
  Top Layer w0.305: U2.22 44.719,36.612 45.745,35.585 45.745,29.536 44.733,28.524 44.733,20.723 45.771,19.685 46.482,19.685 48.209,17.958 49.022,17.958 49.835,17.145 49.835,15.443 P2.17
SD2: P1.16 U2.17 | length 62.7
  Top Layer w0.305: v1(30.988,9.703) 30.988,13.025 31.882,13.919 34.696,13.919 35.585,14.808 35.585,20.752 37.49,22.657 37.49,23.927 37.033,24.384 37.033,31.902 38.557,33.426 38.557,36.007 38.369,36.195 U2.17
  Bottom Layer w0.305: P1.16 4.696,10.49 30.201,10.49 v1(30.988,9.703)
SD3: P1.17 U2.18 | length 62.7
  Top Layer w0.305: v1(39.345,39.37) 39.639,39.076 U2.18
  Bottom Layer w0.305: P1.17 1.016,11.63 1.016,23.906 1.473,24.363 4.958,24.363 8.014,27.419 20.942,27.419 34.747,41.224 37.49,41.224 v1(39.345,39.37)
SVN: P1.4 U2.5 | length 38.3
  Top Layer w0.305: U2.5 34.838,50.561 v1(34.9,50.622)
  Bottom Layer w0.305: P1.4 6.952,47.63 9.474,47.63 12.72,50.876 34.646,50.876 v1(34.9,50.622)
SVP: P1.3 U2.4 | length 35.7
  Top Layer w0.305: U2.4 33.238,51.831 v1(33.757,52.349)
  Bottom Layer w0.305: P1.3 8.318,51.537 32.944,51.537 v1(33.757,52.349)
U0RX: P2.5 R6.2 U2.34 | length 49
  Top Layer w0.305: v1(47.32,45.568) 47.32,49.85 48.031,50.561 U2.34 ; R6.2 48.626,22.164 50.007,20.782 v1(50.007,19.583)
  Bottom Layer w0.305: v1(47.32,45.568) 50.19,45.568 P2.5 57.15,38.608 57.15,22.504 56.337,21.692 52.116,21.692 v1(50.007,19.583)
U0TX: P2.4 U2.35 U4.25 | length 105.2
  Top Layer w0.305: v1(10.795,13.818) 11.335,14.357 11.335,16.414 9.601,18.147 9.601,20.142 8.763,20.98 8.763,23.393 10.008,24.638 U4.25 ; v1(46.101,47.904) 46.101,50.536 47.396,51.831 U2.35
  Bottom Layer w0.305: v1(10.795,13.818) 12.522,15.545 41.133,15.545 41.378,15.3 42.962,15.3 43.207,15.545 48.514,15.545 54.204,21.234 57.15,21.234 57.582,21.666 57.582,40.716 P2.4 50.394,47.904 v1(46.101,47.904)
VDD3V3: BMP.1 C1.1 C3.1 Doamdat.1 MPU.1 P1.1 P3.1 P5.1 R1.2 R4.2 U1.2 U2.2 U3.2 | length 196
  Top Layer w0.305: P1.1 2.494,53.365 2.54,53.411 P5.1 ; v1(8.633,48.666) C1.1 10.719,44.761 11.715,43.764 16.104,43.764 17.285,44.946 C3.1 ; Doamdat.1 13.843,59.944 BMP.1 ; MPU.1 31.344,54.635 U2.2 33.73,54.371 36.22,51.88 36.22,40.361 v1(35.052,39.192) ; U1.2 33.299,8.636 33.528,8.865 33.528,10.465 33.299,10.693 32.766,10.693 32.542,10.917 32.542,12.989 32.583,13.03 36.408,13.03 37.567,11.872 R1.2 39.178,13.767 38.049,14.895 38.049,18.923 38.994,19.868 R4.2 38.994,24.989 38.303,25.679 38.303,30.963 v1(39.751,32.41)
  Bottom Layer w0.305: P1.1 1.448,49.746 1.448,45.11 1.88,44.679 3.378,44.679 7.366,48.666 v1(8.633,48.666) ; P5.1 12.192,56.007 BMP.1 16.662,57.125 25.502,57.125 MPU.1 ; Doamdat.1 16.002,65.659 51.054,65.659 P3.1 ; v1(35.052,39.192) 38.481,35.763 38.481,34.036 39.294,33.223 40.056,33.223 40.691,33.858 ; v1(39.751,32.41) 40.691,33.35 40.691,33.858 ; U3.2 45.695,36.093 41.707,36.093 40.691,35.077 40.691,33.858
VDD5V: C2.2 D1.C D2.1 P1.19 U1.3 U5.2 | length 97.8
  Top Layer w0.305: U5.2 13.846,51.762 C2.2 16.129,44.769 17.257,45.898 23.038,45.898 24.457,44.479 D1.C 27.94,42.824 30.734,40.03 30.734,33.655 33.655,30.734 D2.1 32.255,15.466 30.24,13.451 30.24,10.926 U1.3 26.742,10.926 v1(24.935,9.119)
  Bottom Layer w0.305: P1.19 1.448,6.119 1.448,8.026 2.54,9.119 v1(24.935,9.119)
VDDUSB: C5.2 C6.2 D1.A U4.7 U4.8 USB1.1 | length 48.1
  Top Layer w0.305: USB1.1 12.344,10.516 15.089,13.26 U4.7 15.977,22.047 16.18,22.25 U4.8 19.887,23.138 21.031,24.282 21.031,36.474 21.594,37.037 ; C5.2 21.594,37.037 ; D1.A 27.94,39.827 25.15,37.037 C6.2 21.594,37.037
pads on no net: Doamdat.3 U1.4 U2.32 U2.GND U3.3 U4.9 U4.10 U4.12 U4.13 U4.14 U4.15 U4.16 U4.17 U4.18 U4.19 U4.20 U4.21 U4.22 U5.S1 U5.S2 U5.S3 U5.S4
copper on no net: | length 249.9
  Top Layer w0.254: 0.127,0.048 0.127,0.508 0.127,66.653 0.276,66.802 58.271,66.802 58.42,66.653 58.42,0.173 58.271,0.024 0.611,0.024 0.151,0.024 0.127,0.048
  other v2: 11.719,6.208 16.119,6.208

## Polygon pours and split planes (outlines as drawn)
no net on Bottom Layer "NONET_L01_P-001" (solid, pour order 1): 0.254,66.548 0.508,66.802 58.293,66.802 58.293,0 0.127,0 0.127,66.548 0.254,66.675
no net on Bottom Layer "NONET_L01_P-001" (solid, pour order 2): 0.127,66.463 0.254,66.59 0.254,66.675
no net on Bottom Layer "NONET_L01_P-001" (solid, pour order 3): 0.508,66.802 0.381,66.802 0.254,66.675
no net on Bottom Layer "NONET_L01_P-001" (solid, pour order 4): 0.127,66.463 0.381,66.717 0.381,66.802
no net on Top Layer "NONET_L01_P-001" (solid, pour order 0): 0.201,66.728 0.276,66.653 58.42,66.653 58.42,-0.254 58.118,0.048 0.127,0.048 0.127,66.653

## Keep-outs
Keep-Out Layer:
  lines w0.254: 58.547,8.382 58.547,0 ; 58.547,0 0.127,0 -0.127,-0.254 -0.127,66.929 58.547,66.929 58.547,0

## Silkscreen, mask and mechanical layers (free items; w line width, h text height)
Top Overlay:
  text "63DTVT2" at 21.973,2.889 h1.78